# EAGLE board Battlebot (EAGLE 8.0.0)
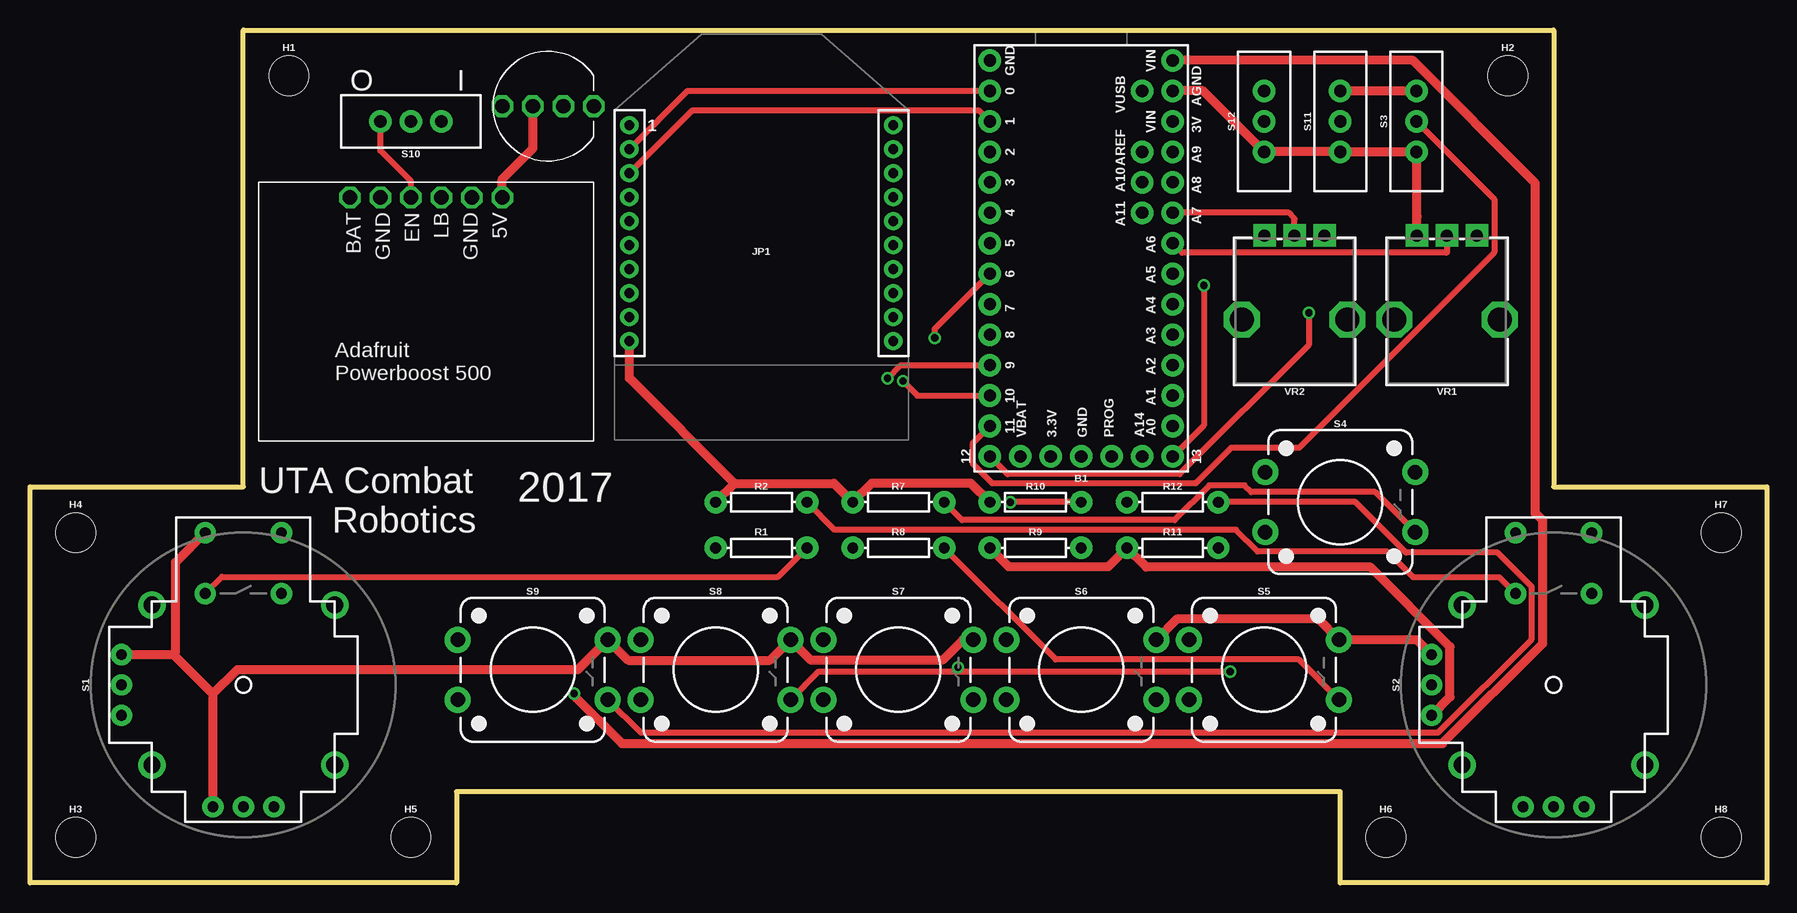
[diagram p0: board, top side]
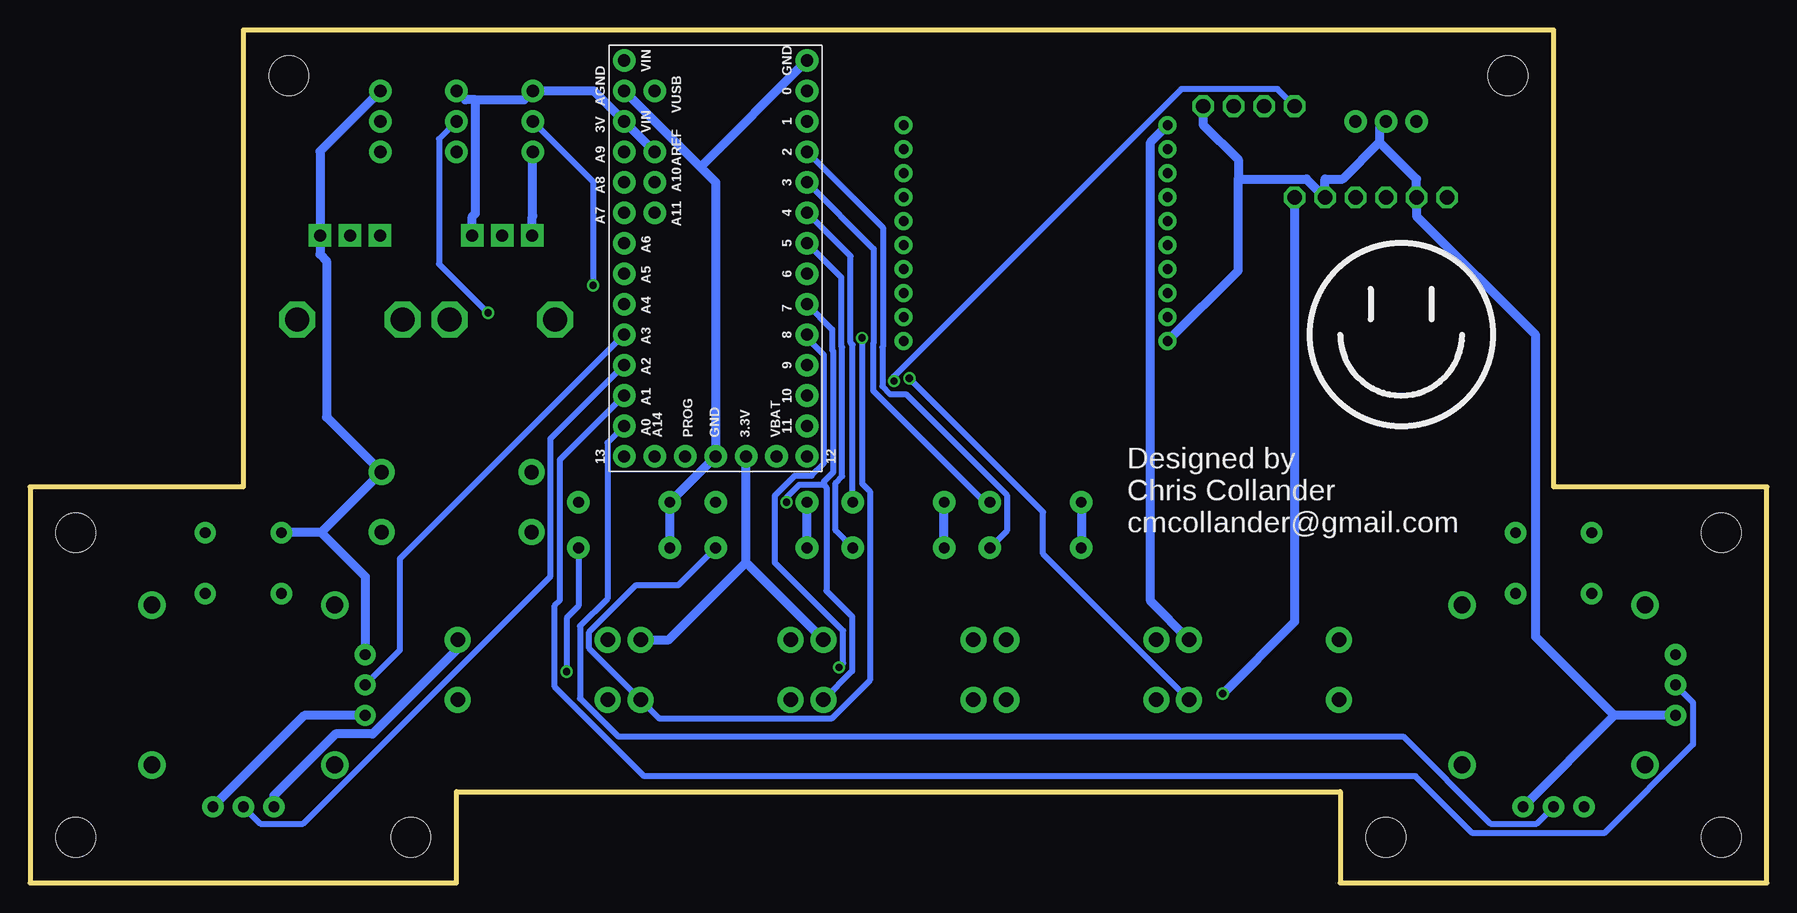
[diagram p1: board, bottom side, seen from below]

Size 144.78 x 71.12 mm. Coordinates in mm from the lower left corner, seen from the top.
Outline: 0,0 0,33.02 17.78,33.02 17.78,71.12 127,71.12 127,33.02 144.78,33.02 144.78,0 109.22,0 109.22,7.62 35.56,7.62 35.56,0 0,0
Copper layers (1*16): Top 0.035mm / dielectric 1.5mm / Bottom 0.035mm
Design rules "default": minimum track width 10mil, minimum drill 24mil, track to track 8mil, track to pad 8mil, pad to pad 8mil, via to via 8mil, smd to smd 8mil, copper to edge 40mil, drill to drill 8mil, minimum pad ring 10mil, minimum via ring 8mil, stop-mask expansion 4mil, vias tented up to drill 0mil, thermal gap 10mil
Net classes: 0 default: width 0.508 mm, clearance 0.254 mm; 1 power: width 0.762 mm, clearance 0.254 mm

## Footprints (pad centres in the part's own frame; a part is rotated, then mirrored left to right if it is on the bottom)
TEENSY-3.1 = drill 1.016 pad 1.88: 0 7.62,-13.97; 1 7.62,-11.43; 2 7.62,-8.89; 3 7.62,-6.35; 3.3V 2.54,16.51; 3V -7.62,-11.43; 4 7.62,-3.81; 5 7.62,-1.27; 6 7.62,1.27; 7 7.62,3.81; 8 7.62,6.35; 9 7.62,8.89; 10 7.62,11.43; 11 7.62,13.97; 12 7.62,16.51; 13 -7.62,16.51; 14 -7.62,13.97; 15 -7.62,11.43; 16 -7.62,8.89; 17 -7.62,6.35; 18 -7.62,3.81; 19 -7.62,1.27; 20 -7.62,-1.27; 21 -7.62,-3.81; 22 -7.62,-6.35; 23 -7.62,-8.89; A10 -5.08,-6.35; A11 -5.08,-3.81; A14/DAC -5.08,16.51; AGND -7.62,-13.97; AREF -5.08,-8.89; GND 0,16.51; GND1 7.62,-16.51; PROG -2.54,16.51; VBAT 5.08,16.51; VIN -7.62,-16.51; VUSB -5.08,-13.97
STAND-OFF = hole 3.302: 0,0
XBEE = drill 0.8 pad 1.524: 1 -11,20; 2 -11,18; 3 -11,16; 4 -11,14; 5 -11,12; 6 -11,10; 7 -11,8; 8 -11,6; 9 -11,4; 10 -11,2; 11 11,2; 12 11,4; 13 11,6; 14 11,8; 15 11,10; 16 11,12; 17 11,14; 18 11,16; 19 11,18; 20 11,20
AXIAL-0.3 = drill 0.9 pad 1.88: P$1 -3.81,0; P$2 3.81,0
JOYSTICK = drill 0.9 pad 1.778: B1A -3.175,12.7; B1B 3.175,12.7; B2A -3.175,7.62; B2B 3.175,7.62 | drill 0.889 pad 1.778: H1 -2.54,-10.16; H2 0,-10.16; H3 2.54,-10.16; V1 -10.16,2.54; V2 -10.16,0; V3 -10.16,-2.54 | drill 1.397 pad 2.286: MOUNT1 -7.62,6.668; MOUNT2 -7.62,-6.668; MOUNT3 7.62,-6.668; MOUNT4 7.62,6.668
SWITCH_SPDT_PTH_11.6X4.0MM = drill 1.016 pad 1.88: 1 0,2.54; 2 0,0; 3 0,-2.54
TACTILE_SWITCH_PTH_12MM = drill 1.2 pad 2.159: 1 6.25,-2.5; 2 -6.25,-2.5; 3 6.25,2.5; 4 -6.25,2.5
ADABOOST = drill 1.2 octagon: 5V 6.35,0; BAT -6.35,0; EN -1.27,0; GND -3.81,0; GND2 3.81,0; LB 1.27,0
WS2812-THROUGHHOLE = drill 1.2 octagon: 5V -1.27,0; DIN -3.81,0; DOUT 1.27,0; GND 3.81,0
POT-PTH-ALPS = drill 1 pad 1.88 square: P$1 7,-2.5; P$2 7,0; P$3 7,2.5 | drill 2 octagon: P$4 0,-4.4; P$5 0,4.4

## Placement (x,y rotation side)
B1  TEENSY-3.1SILK  [TEENSY-3.1]  87.63,52.07 180 top
H1  STAND-OFF  [STAND-OFF]  21.59,67.31 0 top
H2  STAND-OFF  [STAND-OFF]  123.19,67.31 0 top
H3  STAND-OFF  [STAND-OFF]  3.81,3.81 0 top
H4  STAND-OFF  [STAND-OFF]  3.81,29.21 0 top
H5  STAND-OFF  [STAND-OFF]  31.75,3.81 0 top
H6  STAND-OFF  [STAND-OFF]  113.03,3.81 0 top
H7  STAND-OFF  [STAND-OFF]  140.97,29.21 0 top
H8  STAND-OFF  [STAND-OFF]  140.97,3.81 0 top
JP1  [XBEE]  60.96,43.18 0 top
R1  10k  [AXIAL-0.3]  60.96,27.94 0 top
R2  10k  [AXIAL-0.3]  60.96,31.75 0 top
R7  10k  [AXIAL-0.3]  72.39,31.75 0 top
R8  10k  [AXIAL-0.3]  72.39,27.94 0 top
R9  10k  [AXIAL-0.3]  83.82,27.94 0 top
R10  10k  [AXIAL-0.3]  83.82,31.75 0 top
R11  10k  [AXIAL-0.3]  95.25,27.94 0 top
R12  10k  [AXIAL-0.3]  95.25,31.75 0 top
S1  JOYSTICK_THUMB  [JOYSTICK]  17.78,16.51 0 top
S2  JOYSTICK_THUMB  [JOYSTICK]  127,16.51 0 top
S3  [SWITCH_SPDT_PTH_11.6X4.0MM]  115.57,63.5 0 top
S4  [TACTILE_SWITCH_PTH_12MM]  109.22,31.75 0 top
S5  [TACTILE_SWITCH_PTH_12MM]  102.87,17.78 0 top
S6  [TACTILE_SWITCH_PTH_12MM]  87.63,17.78 0 top
S7  [TACTILE_SWITCH_PTH_12MM]  72.39,17.78 0 top
S8  [TACTILE_SWITCH_PTH_12MM]  57.15,17.78 0 top
S9  [TACTILE_SWITCH_PTH_12MM]  41.91,17.78 0 top
S10  [SWITCH_SPDT_PTH_11.6X4.0MM]  31.75,63.5 90 top
S11  [SWITCH_SPDT_PTH_11.6X4.0MM]  109.22,63.5 0 top
S12  [SWITCH_SPDT_PTH_11.6X4.0MM]  102.87,63.5 0 top
U$1  ADABOOST  [ADABOOST]  33.02,57.15 0 top
U$2  WS2812  [WS2812-THROUGHHOLE]  43.18,64.77 0 top
VR1  10k  [POT-PTH-ALPS]  118.11,46.99 90 top
VR2  10k  [POT-PTH-ALPS]  105.41,46.99 90 top

## Library data of the parts
B1 = SparkFun-Boards; SF_ID: DEV-12646
H1-H8 = SparkFun-Hardware
JP1 = SparkFun-RF
R1 R2 R7-R12 = SparkFun-Resistors; PROD_ID: RES-12183
S1 S2 = SparkFun-Switches; PROD_ID: COMP-09744; SF_SKU: COM-09032
S3 S10-S12 = SparkFun-Switches; PROD_ID: SWCH-08261; SF_SKU: COM-00102
S4-S9 = SparkFun-Switches; PROD_ID: SWCH-09185; SF_SKU: COM-09190
U$1 U$2 = chris
VR1 VR2 = SparkFun-Resistors; PROD_ID: RES-09177; SF_SKU: COM-09288

## Nets
3.3V [power]: B1.3.3V B1.3V B1.AREF JP1.1 S1.B1A S1.H1 S1.V1 S2.B1A S2.H1 S2.V1 S3.1 S4.3 S5.3 S6.3 S7.3 S8.3 S9.3 S11.1 S12.1 VR1.P$1 VR2.P$1
5V [power]: B1.VIN U$1.5V U$2.5V
B1: B1.4 R7.P$2 S4.1
B2: B1.5 R8.P$2 S5.1
B3: B1.6 R9.P$2 S6.1
B4: B1.7 R10.P$2 S7.1
B5: B1.8 R11.P$2 S8.1
B6: B1.9 R12.P$2 S9.1
GND [power]: B1.AGND B1.GND B1.GND1 JP1.10 R1.P$1 R2.P$1 R7.P$1 R8.P$1 R9.P$1 R10.P$1 R11.P$1 R12.P$1 S1.H3 S1.V3 S2.H3 S2.V3 S3.3 S10.2 S11.3 S12.3 U$1.GND U$1.GND2 U$2.GND VR1.P$3 VR2.P$3
H1: B1.14 S1.H2
H2: B1.16 S2.H2
KNOB1: B1.20 VR1.P$2
KNOB2: B1.21 VR2.P$2
LED: B1.10 U$2.DIN
N$2: S10.1 U$1.EN
S1: B1.2 R1.P$2 S1.B2A
S2: B1.3 R2.P$2 S2.B2A
SW1: B1.11 S3.2
SW2: B1.12 S11.2
SW3: B1.13 S12.2
URX: B1.0 JP1.2
UTX: B1.1 JP1.3
V1: B1.15 S1.V2
V2: B1.17 S2.V2
VBAT: B1.VBAT
VUSB: B1.VUSB

## Tracks (layer width: path | path; a pad name or v marks a point on that pad's centre or on a via)
3.3V
  Top 0.762: 15.24,15.75 17.27,17.78 45.66,17.78 S9.3 49.88,18.57 61.69,18.57 S8.3 65.11,18.57 76.05,18.57 77.77,20.28 S7.3 | 15.24,15.75 S1.H1 | 11.94,19.05 15.24,15.75 | 11.94,19.05 12.14,19.25 12.14,26.74 S1.B1A | S1.V1 11.94,19.05 | S6.3 95.6,22 107.4,22 S5.3 115.61,20.28 S2.V1 | S11.1 S3.1
  Bottom 0.762: B1.AREF B1.3V 97.79,66.04 S12.1 103.61,65.3 107.64,65.3 | S9.3 51.38,23.5 51.38,61.76 JP1.1 | 85.09,26.73 B1.3.3V | S7.3 85.09,26.73 | S6.3 91.54,20.28 85.09,26.73 | S5.3 109.12,19.54 116.22,12.43 119.31,12.43 124.46,7.28 S2.H1 | S3.1 120.61,61 VR1.P$1 120.61,52.41 120.06,51.87 120.06,38.84 S4.3 120.51,29.21 | 120.51,29.21 S2.B1A | 120.51,29.21 116.84,25.54 S2.V1 | 107.64,65.3 108.48,65.3 S11.1 | 107.64,65.3 107.64,55.83 107.91,55.56 VR2.P$1
5V  (via drill 0.61 pad 1.02)
  Top 0.762: v45.36,15.78 45.36,15.6 49.34,11.62 117.75,11.62 126.08,19.96 126.08,30.24 125.48,30.85 125.48,58.36 115.26,68.58 B1.VIN | U$1.5V 39.37,58.69 41.91,61.23 U$2.5V
  Bottom 0.762: U$1.5V 39.37,21.77 v45.36,15.78
B1
  Top 0.508: S4.1 112.13,32.59 101.8,32.59 101.24,33.16 98.31,33.16 95.41,30.26 77.69,30.26 R7.P$2
  Bottom 0.508: R7.P$2 76.2,44.86 76.38,45.04 76.38,52.25 B1.4
B2
  Top 0.508: S5.1 105.76,18.64 85.5,18.64 R8.P$2
  Bottom 0.508: R8.P$2 77.63,29.37 77.63,33.35 77.07,33.91 77.07,44.65 77.15,44.73 77.15,50.48 B1.5
B3  (via drill 0.61 pad 1.02)
  Top 0.508: v75.42,45.44 75.42,46.21 B1.6
  Bottom 0.508: R9.P$2 90.74,24.83 94.25,24.83 98.17,20.92 98.17,19.57 S6.1 92.3,13.7 77.98,13.7 74.78,16.9 74.78,32.66 75.42,33.3 v75.42,45.44
B4  (via drill 0.61 pad 1.02)
  Top 0.508: R10.P$2 v81.72,31.75
  Bottom 0.508: 78.61,33.2 80.67,33.2 81.72,32.15 v81.72,31.75 | B1.7 77.91,46.16 77.91,44.41 77.83,44.34 77.83,34.23 78.61,33.46 78.61,33.2 | 78.61,33.2 78.4,32.99 78.4,24.36 76.24,22.2 76.24,17.68 S7.1
B5  (via drill 0.61 pad 1.02)
  Top 0.508: 77.35,17.62 v100.05,17.62 | S8.1 65.74,17.62 77.35,17.62 | 77.35,17.62 v77.35,17.98
  Bottom 0.508: v77.35,17.98 77.01,18.32 77.01,21.02 82.68,26.69 82.68,32.29 81.01,33.96 79.63,33.96 78.6,34.99 78.6,44.02 80.01,45.43 B1.8 | R11.P$2 99.06,23.08 100.05,22.09 v100.05,17.62
B6  (via drill 0.61 pad 1.02)
  Top 0.508: v71.48,42.08 72.58,43.18 B1.9 | S9.1 50.9,12.54 117.39,12.54 125.17,20.32 125.17,24.69 122.32,27.54 114.69,27.54 110.49,31.75 R12.P$2
  Bottom 0.508: S9.1 60.33,27.45 60.33,30.92 v71.48,42.08
GND
  Top 0.762: R9.P$1 81.59,26.36 89.86,26.36 R11.P$1 93.05,26.33 111.73,26.33 118.37,19.68 118.37,15.5 S2.V3 | R10.P$1 78.44,33.33 70.16,33.33 R7.P$1 67,33.33 58.73,33.33 | R2.P$1 58.73,33.33 | 58.73,33.33 49.96,42.09 JP1.10 | B1.AGND 97.79,66.04 S12.3 S11.3 S3.3 115.57,55.6 115.61,55.56 VR1.P$3
  Bottom 0.762: JP1.10 44.07,51.07 44.07,58.69 | R2.P$1 R1.P$1 | 88.9,59.69 87.63,58.42 B1.GND R12.P$1 R11.P$1 | S2.V3 121.92,13.97 S2.H3 | B1.AGND 88.9,59.69 | 88.9,59.69 B1.GND1 | 32.28,61.76 29.21,58.69 U$1.GND 29.21,55.62 19.26,45.67 19.26,20.53 12.7,13.97 | S10.2 32.28,62.97 32.28,61.76 | 32.28,61.76 35.36,58.69 36.83,58.69 U$1.GND2 38.37,58.69 44.07,58.69 | R8.P$1 R7.P$1 | R9.P$1 R10.P$1 | 12.7,13.97 S1.H3 | S1.V3 12.7,13.97 | U$2.GND 46.99,63.23 44.07,60.31 44.07,58.69 | VR2.P$3 102.91,55.56 102.87,55.6 S12.3
H1
  Bottom 0.508: B1.14 96.65,36.7 96.65,23.7 98.93,21.42 98.93,15.38 95.76,12.21 30.31,12.21 23.05,4.95 19.18,4.95 S1.H2
H2
  Bottom 0.508: S2.H2 125.59,4.94 122.02,4.94 101.39,25.57 101.39,37.04 B1.16
KNOB1
  Top 0.508: VR1.P$2 118.11,52.59 118.06,52.54 96.05,52.54 B1.20
KNOB2
  Top 0.508: VR2.P$2 105.41,55.39 104.92,55.88 B1.21
LED  (via drill 0.61 pad 1.02)
  Top 0.508: v72.77,41.84 73.97,40.64 B1.10
  Bottom 0.508: U$2.DIN 40.78,66.19 48.8,66.19 72.77,42.23 v72.77,41.84
N$2
  Top 0.508: U$1.EN 31.75,58.51 29.21,61.05 S10.1
S1
  Top 0.508: S1.B2A 16.01,25.53 62.36,25.53 R1.P$2
  Bottom 0.508: B1.2 73.69,54.64 73.69,44.73 73.74,44.68 73.74,41.41 73.08,40.76 71.77,40.76 63.36,32.34 63.36,29.35 R1.P$2
S2
  Top 0.508: S2.B2A 122.48,25.48 115.3,25.48 113.14,27.64 102.35,27.64 100.54,29.45 67.08,29.45 R2.P$2
  Bottom 0.508: B1.3 74.45,52.86 74.45,45.04 74.5,44.99 74.5,41.05 65.2,31.75 R2.P$2
SW1
  Top 0.508: S3.2 122.06,57.01 122.06,52.55 105.79,36.28 100.11,36.28 97.15,33.33 80.21,33.33 78.59,34.95 78.59,36.68 B1.11
SW2  (via drill 0.61 pad 1.02)
  Top 0.508: v106.6,47.53 106.6,44.87 95.82,34.09 81.48,34.09 B1.12
  Bottom 0.508: S11.2 110.69,62.03 110.69,51.62 v106.6,47.53
SW3  (via drill 0.61 pad 1.02)
  Top 0.508: v97.85,49.82 97.85,38.16 B1.13
  Bottom 0.508: S12.2 97.85,58.48 v97.85,49.82
URX
  Top 0.508: JP1.2 54.82,66.04 B1.0
UTX
  Top 0.508: JP1.3 55.21,64.43 79.08,64.43 B1.1
V1
  Bottom 0.508: S1.V2 6.16,15.05 6.16,11.54 13.56,4.15 24.54,4.15 29.29,8.9 93.59,8.9 101.05,16.36 101.05,23.12 100.6,23.57 100.6,35.29 B1.15
V2
  Bottom 0.508: S2.V2 113.93,19.42 113.93,27.04 B1.17

## Text on the board
tPlace: O | I | 2017 | UTA Combat / Robotics
bPlace: Designed by / Chris Collander / cmcollander@gmail.com